# Altium PCB Pulser.PcbDoc
Units mm, origin at the board's own origin, x right, y up, seen from the top; angles counter-clockwise.
Board outline 100 x 100 mm, 4 copper layers (Top Layer, GND, PWR, Bottom Layer), stack 1.564 mm thick; 85 components, 67 nets, 326 pads, 191 vias.
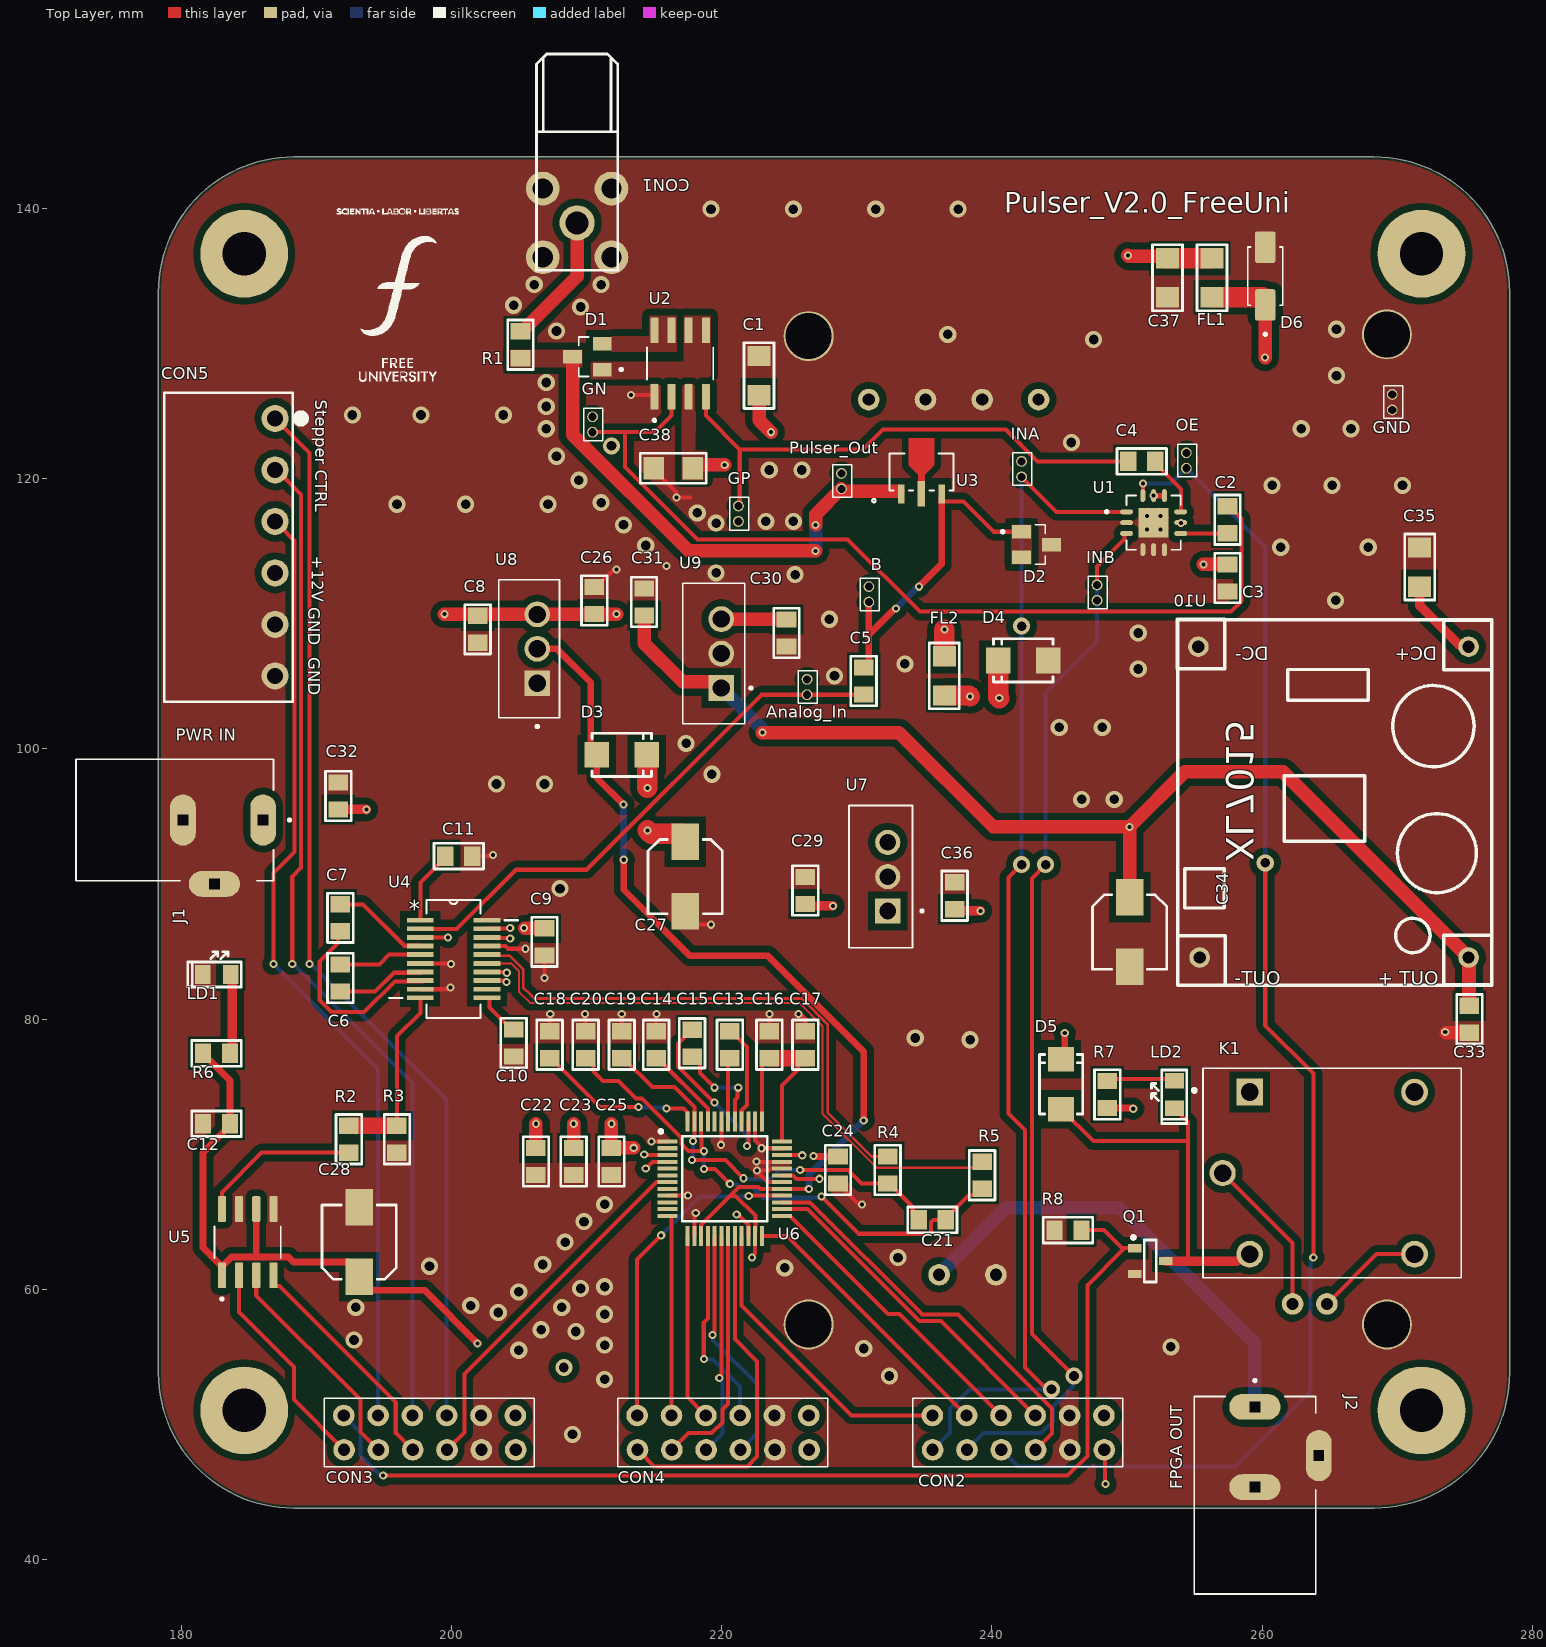
[diagram p0: Top Layer view]
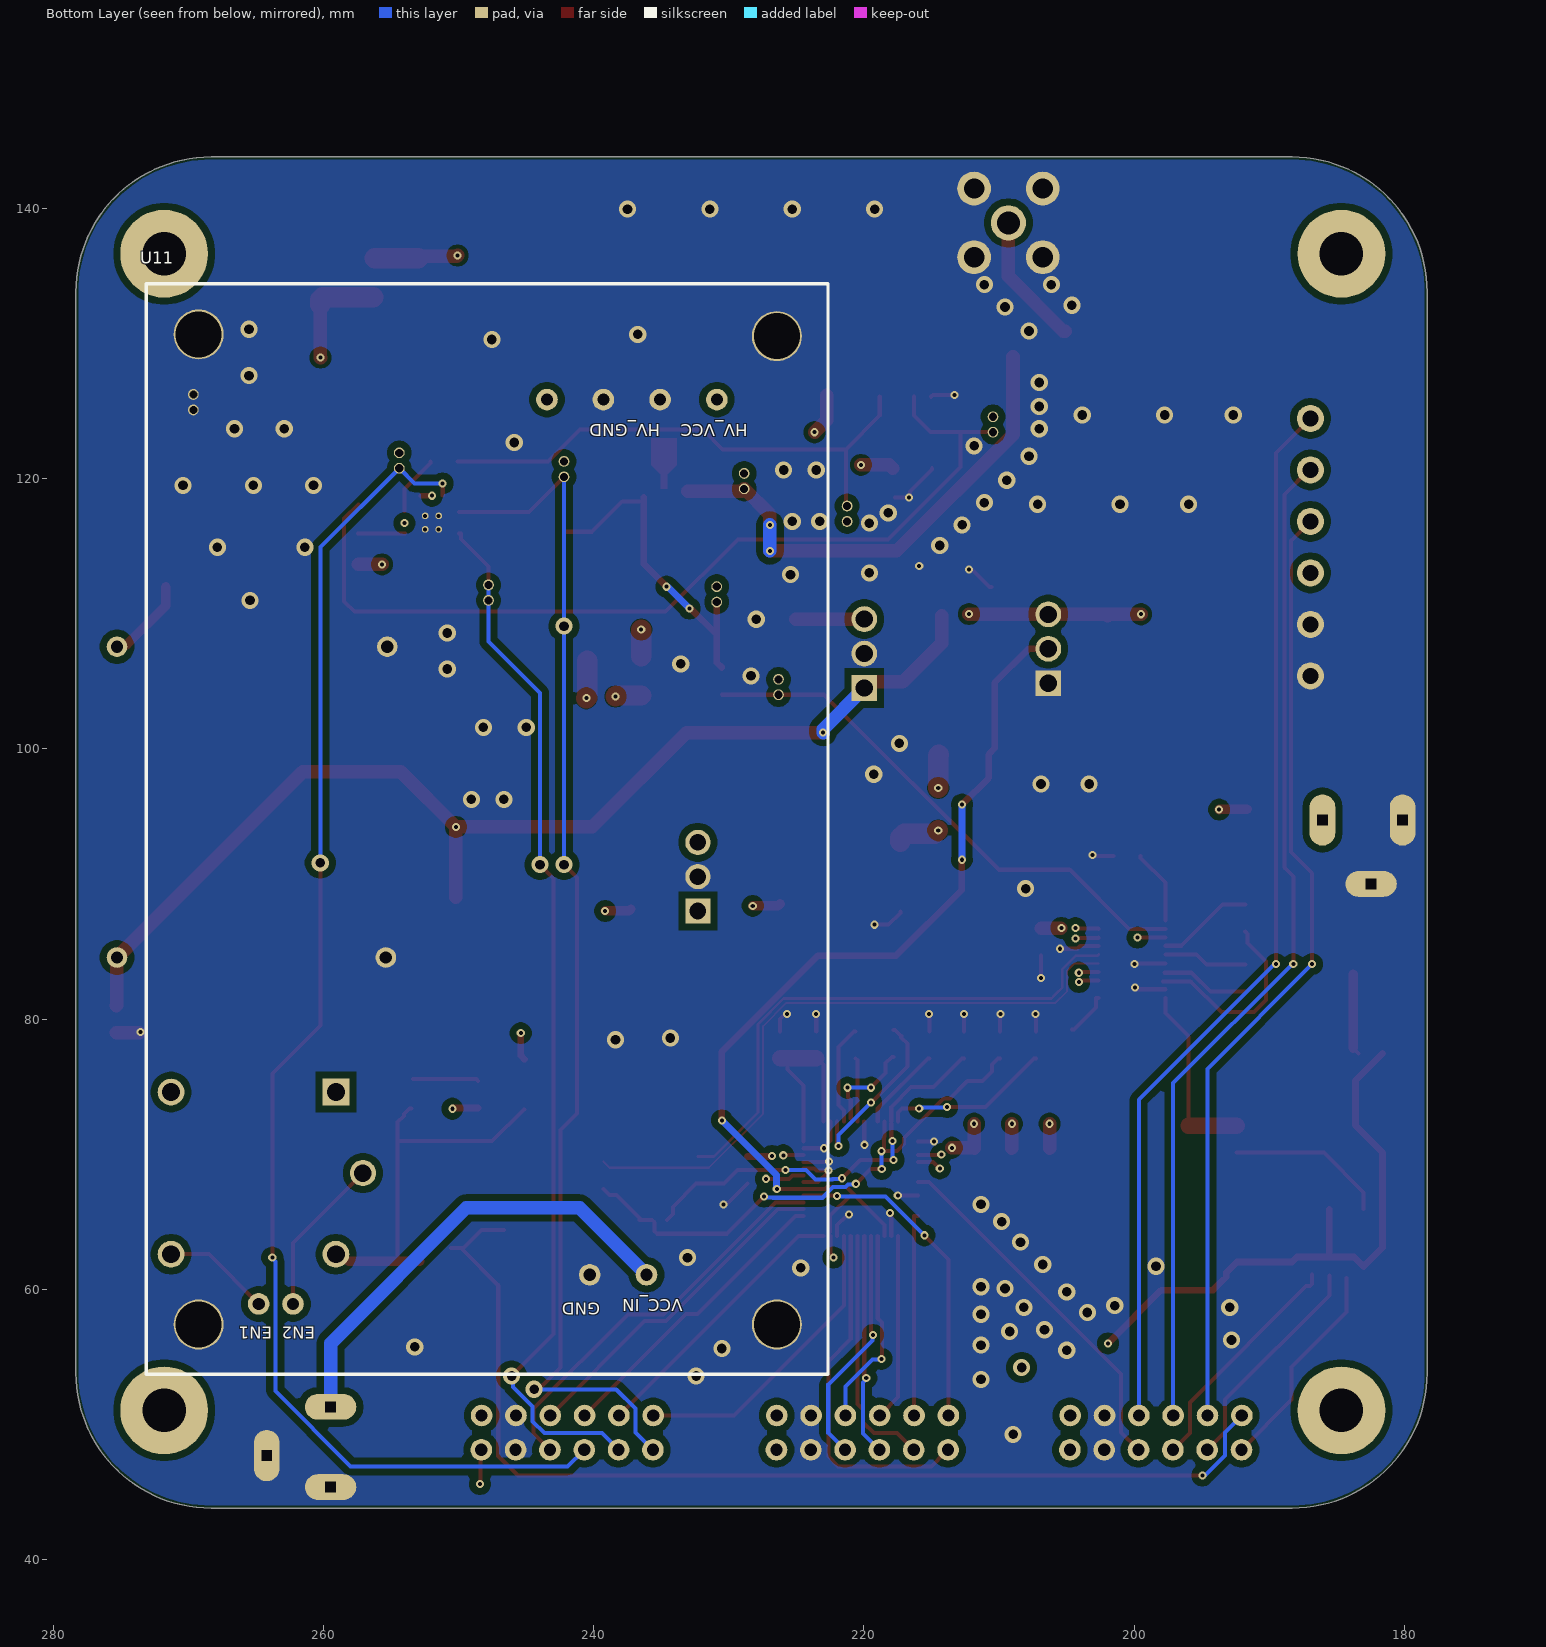
[diagram p1: Bottom Layer view, seen from below]
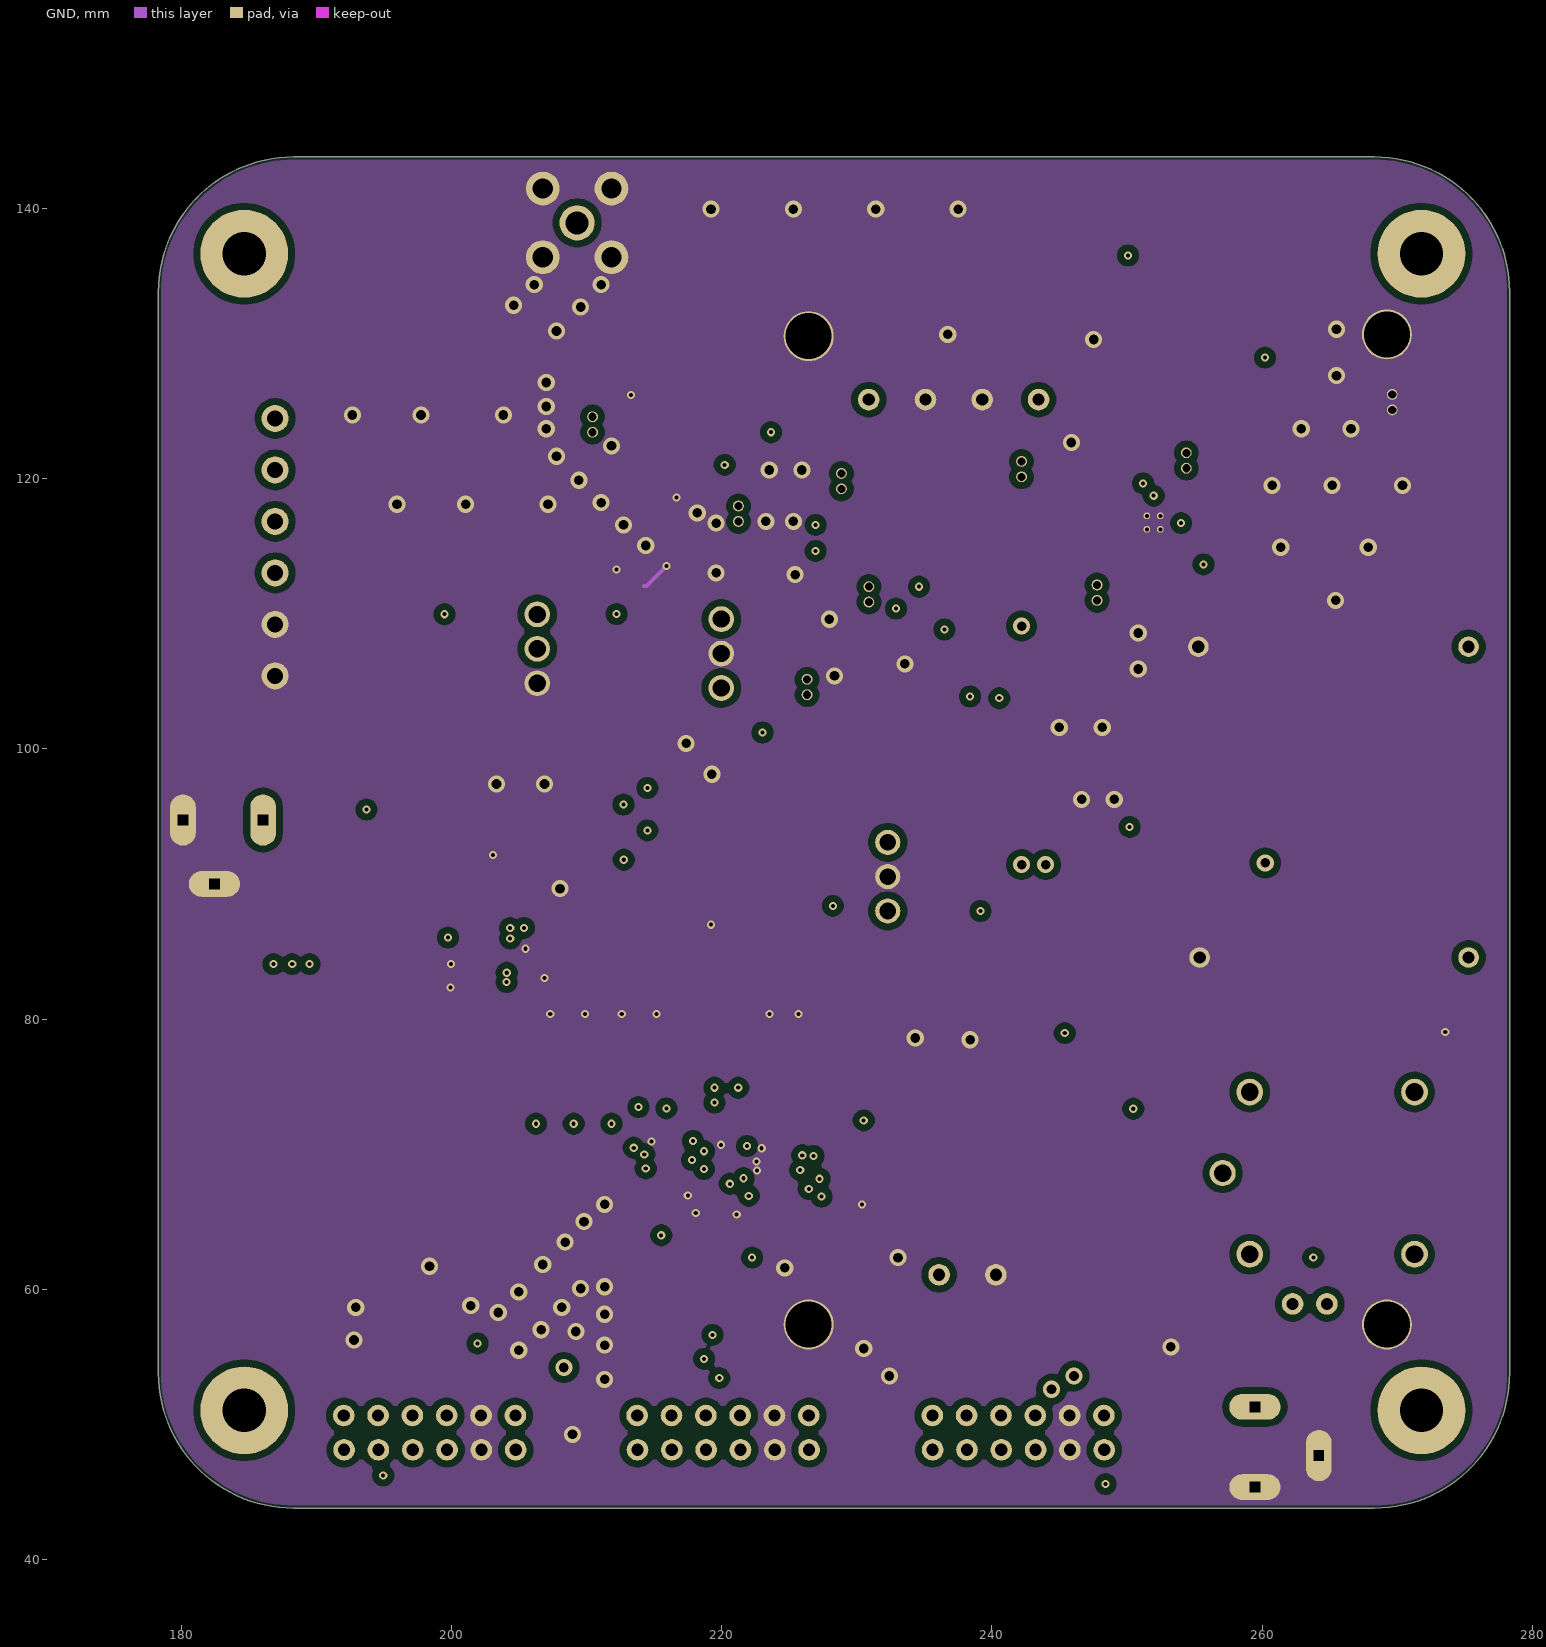
[diagram p2: GND]
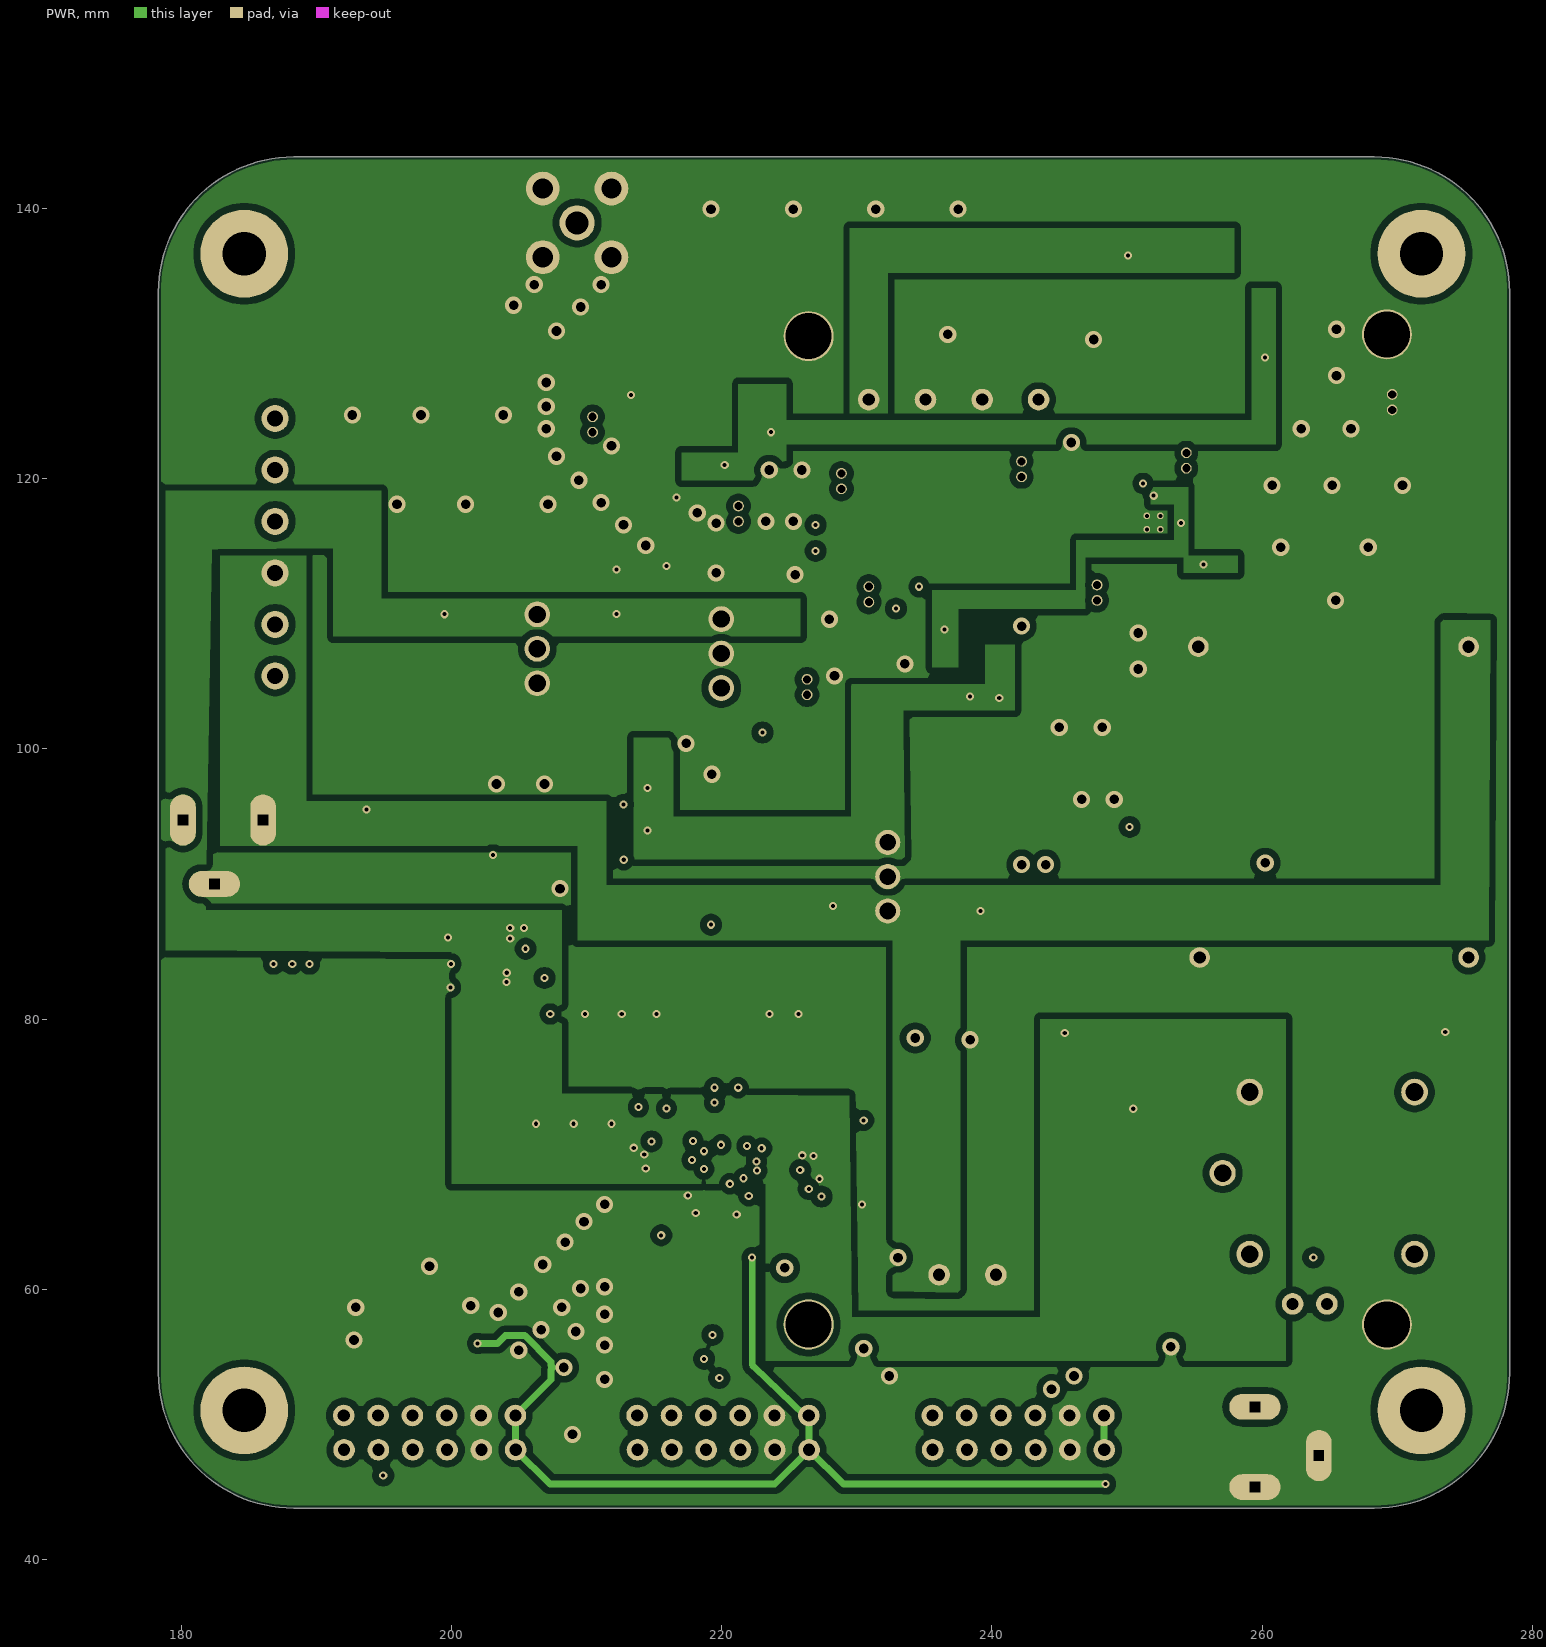
[diagram p3: PWR]

## Layer stack, top to bottom
Top Solder: solder mask 0.0102, Solder Resist, Dk 3.5
Top Layer: signal copper 0.035
Dielectric 2: prepreg 0.0994, PP-006, Dk 4.1
GND: signal copper 0.0152
Dielectric 1: dielectric 1.265, FR-4, Dk 4.6
PWR: signal copper 0.0152
Dielectric 3: prepreg 0.0994, PP-006, Dk 4.1
Bottom Layer: signal copper 0.035
Bottom Solder: solder mask 0.0102, Solder Resist, Dk 3.5

## Board outline
178.308,53.815 178.308,133.815 cw(c188.308,133.815) 188.308,143.815 268.308,143.815 cw(c268.308,133.815) 278.308,133.815 278.308,53.815 cw(c268.308,53.815) 268.308,43.815 188.308,43.815 cw(c188.308,53.815)

## Design rules (kind name [scope] priority, off if disabled: settings)
BoardOutlineClearance [All] p1: gap=0.2 ignorepadtopadclearanceinfootprint=FALSE except(0: Track-OutlineEdge)
Clearance Clearance_2 [InDifferentialPair('ADC_IN')] p1: gap=0.5 ignorepadtopadclearanceinfootprint=TRUE except(0.08: SMDPad-SMDPad; 0.1: Arc-Arc Arc-Track Track-Track; 0.152: Arc-SMDPad Arc-Text Track-SMDPad Track-Text SMDPad-THPad SMDPad-Via SMDPad-Text SMDPad-Hole THPad-THPad THPad-Via THPad-Text THPad-Hole Via-Text Fill-Text Fill-Hole Poly-Text Poly-Hole Region-Text Region-Hole Text-Text Text-Hole; 0.2: Arc-Via Arc-Hole Track-Via Track-Hole; 0.28: Arc-THPad Track-THPad)
Clearance Clearance_1 [InNetClass('High Voltage')] p2: gap=0.6 ignorepadtopadclearanceinfootprint=TRUE
Clearance [All] p3: gap=0.5 ignorepadtopadclearanceinfootprint=TRUE except(0.08: SMDPad-SMDPad; 0.152: Arc-SMDPad Arc-Text Track-SMDPad Track-Text SMDPad-THPad SMDPad-Via SMDPad-Text SMDPad-Hole THPad-THPad THPad-Via THPad-Text THPad-Hole Via-Text Fill-Text Fill-Hole Poly-Text Poly-Hole Region-Text Region-Hole Text-Text Text-Hole; 0.2: Arc-Arc Arc-Track Arc-Via Arc-Hole Track-Track Track-Via Track-Hole; 0.28: Arc-THPad Track-THPad)
ComponentClearance [All] p1 off: gap=0.254 collisioncheckmode=3 verticalgap=0.254 showdistances=FALSE
DiffPairsRouting [All] p1: maxlimit=0.25 minlimit=0.15 mostfreqgap=0.2 toplayer_minwidth=0.15 toplayer_maxwidth=0.25 toplayer_prefwidth=0.2 midlayer1_minwidth=0.15 midlayer1_maxwidth=0.25 midlayer1_prefwidth=0.2 midlayer2_minwidth=0.15 midlayer2_maxwidth=0.25 midlayer2_prefwidth=0.2 bottomlayer_minwidth=0.15 bottomlayer_maxwidth=0.25 bottomlayer_prefwidth=0.2 maxuncoupledlength=12.7
Height [All] p1: minheight=0 maxheight=1816.048 prefheight=12.7
HoleSize [All] p1: absolutevalues=TRUE maxlimit=6.3 minlimit=0.3 maxpercent=80.000 minpercent=20.000
HoleToHoleClearance [All] p1: gap=0.25 allowstackedmicrovias=FALSE
MatchedLengths MatchLengths_xSignals_U6_CON2,CON3,CON4 [InxSignalClass('xSignals_U6_CON2,CON3,CON4_MatchLengthsClass')] p1: tolerance=2.54 checknetsindiffpair=FALSE checkdiffpairvsdiffpair=TRUE checkxsignals=TRUE checkothers=TRUE
MinimumAnnularRing [All] p1: minimumring=0.076
MinimumSolderMaskSliver [All] p1: minsoldermaskwidth=0
PlaneClearance [All] p1: clearance=0.203
PlaneConnect [All] p1: planeconnectstyle=Direct reliefexpansion=0.3 reliefentries=4 reliefconductorwidth=0.203 reliefairgap=0.203
PolygonConnect PolygonConnect_1 [IsVia] p1: connectstyle=Direct reliefconductorwidth=0.254 reliefentries=4 polygonreliefangle="90 Angle" airgapwidth=0.254
PolygonConnect [IsPad] p2: connectstyle=Direct reliefconductorwidth=0.8 reliefentries=4 polygonreliefangle="90 Angle" airgapwidth=0.5
RoutingVias [All] p1: holewidth=0.3 width=0.6 viastyle="Through Hole" minholewidth=0.3 minwidth=0.6 maxholewidth=0.6 maxwidth=6.6
SilkToSilkClearance [All] p1: silktosilkclearance=0
SilkToSolderMaskClearance [IsPad] p1: minsilkscreentomaskgap=0 clearancetoexposedcopper=TRUE
SolderMaskExpansion [All] p1: expansion=0.075 istentingtop=FALSE
SupplyNets "Schematic Supply Nets_8" [InNet('+5V')] p1: voltage=0.000
SupplyNets "Schematic Supply Nets_7" [InNet('+12V')] p2: voltage=0.000
SupplyNets "Schematic Supply Nets_6" [InNet('+10V')] p3: voltage=0.000
SupplyNets "Schematic Supply Nets_5" [InNet('+100V')] p4: voltage=0.000
SupplyNets "Schematic Supply Nets_4" [InNet('+3.3V')] p5: voltage=0.000
SupplyNets "Schematic Supply Nets_3" [InNet('+6.5V')] p6: voltage=0.000
SupplyNets "Schematic Supply Nets" [InNet('GND')] p7: voltage=0.000
Width "100 Width" [InNetClass('High Voltage')] p1: maxlimit=5 minlimit=0.5 preferedwidth=1.5
Width PWR_WIDTH [InNetClass('Power')] p2: maxlimit=5 minlimit=0.3 preferedwidth=0.7
Width [All] p3: maxlimit=4 minlimit=0.3 preferedwidth=0.3
20 further rules are at their usual default settings.

## Classes and differential pairs
component class Pulser: Analog_In B C1 C2 C3 C4 C5 CON1 D1 D2 FL2 GN GND GP INA INB OE Pulser_Out R1 U1 U2 U3
component class Power: C26 C27 C28 C29 C30 C31 C32 C33 C34 CON5 D3 D4 J1 J2 LD1 R6 U7 U8 U9 U10
component class "Boost Converter": C35 C36 C37 C38 D5 D6 FL1 K1 LD2 Q1 R7 R8 U11
component class "Analog Front End": C6 C7 C8 C9 C10 C11 C12 R2 R3 U4 U5
component class ADC: C13 C14 C15 C16 C17 C18 C19 C20 C21 C22 C23 C24 C25 CON2 CON3 CON4 R4 R5 U6
differential pair ADC_IN: +ADC_IN_P -ADC_IN_N

## Components (designator, comment, footprint, x,y, rotation, side; value= is the part's Value field where it differs from the comment)
Analog_In "TP" CON_TP 226.314,104.267 r0 top (schematic designator TP7)
B "TP" CON_TP 230.886,111.125 r0 top (schematic designator TP9)
C1 "1uF" CAP_1206 222.758,127.635 r270 top
C2 "10nF" CAP_0805 257.429,116.967 r90 top
C3 "0.47uF" CAP_0805 257.429,112.649 r270 top
C4 "10nF" CAP_0805 251.079,121.285 r180 top
C5 "0.1uF" CAP_0805 230.505,105.029 r90 top
C6 "0.1uF" CAP_0805 191.77,83.058 r90 top
C7 "0.1uF" CAP_0805 191.77,87.503 r90 top
C8 "0.1uF" CAP_0805 201.93,108.855 r90 top
C9 "0.1uF" CAP_0805 206.883,85.725 r90 top
C10 "0.1uF" CAP_0805 204.597,78.232 r90 top
C11 "0.1uF" CAP_0805 200.533,92.075 r180 top
C12 "0.1uF" CAP_0805 182.611,72.263 r0 top
C13 "0.1uF" CAP_0805 220.599,78.105 r90 top
C14 "0.1uF" CAP_0805 215.138,78.105 r270 top
C15 "0.1uF" CAP_0805 217.805,78.216 r90 top
C16 "0.1uF" CAP_0805 223.52,78.105 r270 top
C17 "4.7uF" CAP_0805 226.187,78.105 r270 top
C18 "100nF" CAP_0805 207.264,78.105 r270 top
C19 "22pF" CAP_0805 212.598,78.105 r270 top
C20 "22pF" CAP_0805 209.931,78.105 r270 top
C21 "220pF" CAP_0805 235.585,65.151 r0 top
C22 "100nF" CAP_0805 206.248,69.469 r270 top
C23 "10uF" CAP_0805 209.042,69.469 r90 top
C24 "100nF" CAP_0805 228.6,68.834 r270 top
C25 "10uF" CAP_0805 211.836,69.469 r90 top
C26 "0.33uF" CAP_0805 210.566,110.982 r270 top
C27 "22uf" CAP_CAN_D5MM 217.297,90.551 r270 top
C28 "22uf" CAP_CAN_D5MM 193.167,63.5 r90 top
C29 "0.33uF" CAP_0805 226.187,89.535 r270 top
C30 "0.1uF" CAP_0805 224.79,108.585 r90 top
C31 "0.33uF" CAP_0805 214.249,110.871 r270 top
C32 "0.1uF" CAP_0805 191.63,96.526 r270 top
C33 "0.1uF" CAP_0805 275.336,79.994 r90 top
C34 "100uf" CAP_CAN_D5MM 250.19,86.452 r270 top
C35 "1uF" CAP_1206 271.653,113.464 r270 top
C36 "10uF" CAP_0805 237.236,89.138 r270 top
C37 "10uF" CAP_1206 252.984,134.874 r90 top
C38 "1uF" CAP_1206 216.408,120.777 r0 top
CON1 "SMA" A-SMA-KWE-15.1A 209.296,138.938 r0 top
CON2 "Arty_S7_Header" CON_2x6_2.54MM_THT 243.205,49.403 r90 top locked
CON3 "Arty_S7_Header" CON_2x6_2.54MM_THT 199.644,49.403 r90 top locked
CON4 "Arty_S7_Header" CON_2x6_2.54MM_THT 221.361,49.403 r90 top locked
CON5 "KF2EDGV-bend-3.81-6p" CONGREEN_1x6_3.81 186.944,114.935 r270 top
D1 "BAV99" DIO_BAV99 210.058,129.032 r180 top
D2 "BAV99" DIO_BAV99 243.289,115.128 r0 top
D3 "SS16" DO-214AC 212.598,99.568 r180 top
D4 "SS16" DO-214AC 242.316,106.553 r0 top
D5 "SS16" DO-214AC 245.11,75.184 r270 top
D6 "B1100-13F" DIOM5226X230N 260.223,135.001 r90 top
FL1 "" BEAD1206S601A40T 256.286,134.874 r270 top
FL2 "" BEAD1206S601A40T 236.474,105.41 r270 top
GN "TP" CON_TP 210.439,123.698 r0 top (schematic designator TP1)
GND "TP" CON_TP 269.621,125.349 r0 top (schematic designator TP8)
GP "TP" CON_TP 221.234,117.094 r0 top (schematic designator TP6)
INA "TP" CON_TP 242.189,120.396 r0 top (schematic designator TP2)
INB "TP" CON_TP 247.777,111.252 r0 top (schematic designator TP3)
J1 "Barrel Jack" MPD_EJ503A 179.515,94.742 r270 top
J2 "FPGA OUT" MPD_EJ503A 259.461,44.768 r0 top
K1 "SRD-05VDC-SL-C" RELAY_SRD-05VDC-SL-C 265.172,68.611 r0 top
LD1 "PWR LED" LED_0805 182.626,83.312 r0 top
LD2 "LED_0805" LED_0805 253.492,74.422 r90 top (schematic designator LED1)
OE "TP" CON_TP 254.381,121.031 r0 top (schematic designator TP5)
Pulser_Out "TP" CON_TP 228.854,119.507 r0 top (schematic designator TP4)
Q1 "DMN3404L-7" SOT23-3 251.714,62.103 r180 top
R1 "200R" RES_0805 205.105,129.921 r90 top
R2 "10k" RES_0805 192.405,71.12 r90 top
R3 "10k" RES_0805 195.961,71.12 r90 top
R4 "33R" RES_0805 232.283,68.834 r90 top
R5 "33R" RES_0805 239.268,68.453 r90 top
R6 "220R" RES_0805 182.611,77.47 r180 top
R7 "330" RES_0805 248.539,74.422 r270 top
R8 "4.7k" RES_0805 245.618,64.389 r0 top
U1 "MD1213K6-G" QFN80P400X400X90-13N 251.961,116.753 r0 top
U2 "TC6320TG-G" SOIC127P600X175-8N 216.916,128.524 r90 top
U3 "MD0100 T/R Switch" TO-243AA_MCH 234.778,120.503 r0 top
U4 "AD8331ARQZ" SOP64P600X165-20N 200.152,84.455 r0 top
U5 "MCP4821-E/SN" SOIC127P600X175-8N 184.912,63.5 r90 top
U6 "AD9226ASTZ" QFP50P900X900X160-48N 220.218,68.199 r0 top
U7 "LM2940T-10.0" TO254P1054X470X1955-3 232.283,90.551 r90 top
U8 "LD1117V33" TO255P1020X450X1968-3 205.74,107.415 r90 top
U9 "L7805CV" TO255P1040X460X1968-3 219.964,104.511 r90 top
U10 "XL7015 Module" XL7015 264.583,95.813 r90 top
U11 "Boost_Conv_Module" Boost_Converter 248.276,93.853 r0 bottom

## Footprints (in the part's own frame and the unit in brackets; to place one, negate y for a bottom-side part, rotate by r counter-clockwise, add the part's x,y. Pads: shape width x height; smd on the part's side, far side on the other; paste and mask are expansions set on the pad)
A-SMA-KWE-15.1A [mm] "1 Inner Bore SMA Board Side Elbow 6GHz 50Ω 5.35mm Through Hole Coaxial Connector (RF) Adapters RoHS"
  round 2.5 hole 1.5: 1(-2.54,2.54) 2(-2.54,-2.54) 3(2.54,-2.54) 4(2.54,2.54)
  round 2.6 hole 1.7: 5(0,0)
  silkscreen extent -3,-3.5 3,12.5, body extent -3,-3 3,11.6, height 11
BEAD1206S601A40T [mm]
  rect 1.5x1.7 smd: 1(-1.45,0) 2(1.45,0)
  silkscreen extent -2.44,-1.11 2.44,1.11, body extent -1.53,-0.8 1.53,0.8, height 0.8
Boost_Converter [mm]
  round 1.6 hole 0.9: 1(-12.192,32.766) 2(-13.199,-32.004) 2(-8.999,-32.004) 2(-7.992,32.766) 3(16.51,34.925) 4(13.97,34.925) 5(-17.399,-32.004) 6(-4.826,-32.004)
  round 3.7 hole 3.4: 2(-21.844,-36.703) 2(-21.844,36.449) 2(20.955,-36.83) 2(20.955,36.449)
  silkscreen extent -25.63,-40.57 24.82,40.12, body extent -25.27,-40.39 24.38,39.62, height 0.25
CAP_0805 [mm] "Chip Capacitor, 2-Leads, Body 2,03x1,35mm, IPC Medium Density"
  rect 1.2x1.45 smd: 1(-1,0) 2(1,0)
  silkscreen extent -1.83,-0.95 1.83,0.95, body extent -1.02,-0.7 1.02,0.7, height 1.3
CAP_1206 [mm] "Chip Capacitor, 2-Leads, Body 3,05x1,56mm, IPC Medium Density"
  rect 1.5x1.7 smd: 1(-1.45,0) 2(1.45,0)
  silkscreen extent -2.44,-1.11 2.44,1.11, body extent -1.53,-0.8 1.53,0.8, height 0.8
CAP_CAN_D5MM [mm] "Aluminum Electrolytic Capacitor, Body 5,40x5,40x5,50mm, IPC Low Density"
  rect 2.7x2.05 smd: 1(-2.575,0) 2(2.575,0)
  silkscreen extent -2.75,-2.75 2.75,2.75, body extent -2.75,-2.75 2.75,2.75, height 5.5
CON_2x6_2.54MM_THT [mm]
  round 1.6 hole 0.9: 1(-1.27,7.596) 2(-1.27,5.056) 3(-1.27,2.516) 4(-1.27,-0.024) 5(-1.27,-2.564) 6(-1.27,-5.104) 7(1.27,7.62) 8(1.27,5.08) 9(1.27,2.54) 10(1.27,0) 11(1.27,-2.54) 12(1.27,-5.08)
  silkscreen extent -2.54,-6.48 2.54,9.06, body extent -2.27,-6.48 2.29,8.76, height 6.3
CON_TP [mm] "Test Point"
  round 0.8 hole 0.6: 1(0,-0.254) 1(0,0.889)
  silkscreen extent -0.64,-0.89 0.76,1.52, body extent -0.64,-0.76 0.76,1.4, height 6.3
CONGREEN_1x6_3.81 [mm] "SOIC, 100-Leads, Body 64,17x3,05mm, Pitch 1,27mm, IPC Medium Density"
  round 2 hole 1.2: 1(-9.525,0) 2(-5.715,0) 3(-1.905,0) 4(1.905,0) 5(5.715,0) 6(9.525,0)
  silkscreen extent -11.43,-8.2 11.43,2.2, body extent -11.43,-8 11.43,1.35, height 6.8
DIO_BAV99 [mm]
  rect 1.4x1 smd: 1(-1.1,0.95) 2(-1.1,-0.95) 3(1.1,0)
  silkscreen extent -2.6,-1.46 0.65,1.46, body extent -1.2,-1.46 1.2,1.46, height 1.2
DIOM5226X230N [mm]
  rrect25% 2.33x1.55 smd: 1(-2.135,0) 2(2.135,0)
  silkscreen extent -4.4,-1.3 2.15,1.3, body extent -2.6,-1.3 2.6,1.3, height 2.4
DO-214AC [mm] "SODFL, 2-Leads, Body 1,30x2,50mm, IPC Medium Density"
  rect 1.8x1.9 smd: 1(-1.85,0) 2(1.85,0)
  silkscreen extent -2.2,-1.6 2.2,1.6, body extent -2,-1.4 2,1.4, height 2.3
LED_0805 [mm]
  rect 1.15x1.4 smd: 1(-1.025,0) 2(1.025,0)
  silkscreen extent -2.14,-0.93 1.81,1.69, body extent -1.03,-0.64 1.04,0.64, height 1.4
MPD_EJ503A [mm]
  oval 3.8x1.9 hole 0.76 square: 1(0,6.54) 2(0,0.61)
  oval 1.9x3.8 hole 0.76 square: 3(4.73,2.94)
  silkscreen extent -4.5,-7.31 4.5,8.59, body extent -4.5,-7.31 4.88,7.31, height 11
QFN80P400X400X90-13N [mm]
  oval 0.95x0.37 smd paste+0 mask+0.102: 1(-2,0.8) 2(-2,0) 3(-2,-0.8) 7(2,-0.8) 8(2,0) 9(2,0.8)
  oval 0.37x0.95 smd paste+0 mask+0.102: 4(-0.8,-2) 5(0,-2) 6(0.8,-2) 10(0.8,2) 11(0,2) 12(-0.8,2)
  round 0.5 hole 0.3 mask+0: 13(-0.5,-0.5) 13(-0.5,0.5) 13(0.5,-0.5) 13(0.5,0.5)
  rect 2.2x2.2 smd paste-0.404 mask+0.102: 13(0,0)
  silkscreen extent -3.57,-2 2,2
QFP50P900X900X160-48N [mm]
  rect 1.475x0.3 smd: 1(-4.238,2.75) 2(-4.238,2.25) 3(-4.238,1.75) 4(-4.238,1.25) 5(-4.238,0.75) 6(-4.238,0.25) 7(-4.238,-0.25) 8(-4.238,-0.75) 9(-4.238,-1.25) 10(-4.238,-1.75) 11(-4.238,-2.25) 12(-4.238,-2.75) 25(4.238,-2.75) 26(4.238,-2.25) 27(4.238,-1.75) 28(4.238,-1.25) 29(4.238,-0.75) 30(4.238,-0.25) 31(4.238,0.25) 32(4.238,0.75) 33(4.238,1.25) 34(4.238,1.75) 35(4.238,2.25) 36(4.238,2.75)
  rect 0.3x1.475 smd: 13(-2.75,-4.238) 14(-2.25,-4.238) 15(-1.75,-4.238) 16(-1.25,-4.238) 17(-0.75,-4.238) 18(-0.25,-4.238) 19(0.25,-4.238) 20(0.75,-4.238) 21(1.25,-4.238) 22(1.75,-4.238) 23(2.25,-4.238) 24(2.75,-4.238) 37(2.75,4.238) 38(2.25,4.238) 39(1.75,4.238) 40(1.25,4.238) 41(0.75,4.238) 42(0.25,4.238) 43(-0.25,4.238) 44(-0.75,4.238) 45(-1.25,4.238) 46(-1.75,4.238) 47(-2.25,4.238) 48(-2.75,4.238)
  silkscreen extent -4.85,-3.15 3.15,3.62
RELAY_SRD-05VDC-SL-C [mm]
  rect 1.98x1.98 / inner round 1.98 / far side rect 1.98x1.98 hole 1.32: A1(-6.1,6)
  round 1.98 hole 1.32: A2(-6.1,-6) NC(6.1,6) NO(6.1,-6)
  round 1.935 hole 1.29: COM(-8.1,0)
  silkscreen extent -10.3,-7.75 9.55,7.75, body extent -9.6,-7.8 9.6,7.8, height 15.8
RES_0805 [mm]
  rect 1.2x1.45 smd: 1(-1,0) 2(1,0)
  silkscreen extent -1.83,-0.95 1.83,0.95, body extent -1.02,-0.7 1.02,0.7, height 1.3
SOIC127P600X175-8N [mm]
  rrect25% 1.9x0.6 smd: 1(-2.455,1.905) 2(-2.455,0.635) 3(-2.455,-0.635) 4(-2.455,-1.905) 5(2.455,-1.905) 6(2.455,-0.635) 7(2.455,0.635) 8(2.455,1.905)
  silkscreen extent -4.3,-2.45 1.18,2.45
SOP64P600X165-20N [mil]
  rect 78x14 smd paste+0 mask+4.02: 1(-97,113) 2(-97,88) 3(-97,63) 4(-97,38) 5(-97,13) 6(-97,-13) 7(-97,-38) 8(-97,-63) 9(-97,-88) 10(-97,-113) 11(97,-113) 12(97,-88) 13(97,-63) 14(97,-38) 15(97,-13) 16(97,13) 17(97,38) 18(97,63) 19(97,88) 20(97,113)
  silkscreen extent -188,-172 187,172, body extent -118,-170 118,170, height 69
SOT23-3 [mm] "SOT23, 5-Leads, Body 2,95x2,45mm, Pitch 0,95mm, IPC Medium Density"
  rect 1x0.6 smd: 1(1.15,-0.95) 2(1.15,0.95) 3(-1.15,0)
  silkscreen extent -0.45,-1.87 1.37,1.55, body extent -0.85,-1.55 0.85,1.55, height 1.3
TO254P1054X470X1955-3 [mm]
  rect 1.86x1.86 / inner round 1.86 / far side rect 1.86x1.86 hole 1.24: 1(-2.54,0)
  round 1.86 hole 1.24: 2(0,0) 3(2.54,0)
  silkscreen extent -5.27,-2.64 5.27,2.86, body extent -5.08,-2.35 5.08,2.35, height 15.49
TO255P1020X450X1968-3 [mm]
  rect 1.91x1.91 / inner round 1.91 / far side rect 1.91x1.91 hole 1.27: 1(-2.55,-0.605)
  round 1.91 hole 1.27: 2(0,-0.605) 3(2.55,-0.605)
  silkscreen extent -5.85,-2.25 5.1,2.25, body extent -5.1,-2.25 5.1,2.25, height 19.68
TO255P1040X460X1968-3 [mm]
  rect 1.91x1.91 / inner round 1.91 / far side rect 1.91x1.91 hole 1.27: 1(0,0)
  round 1.91 hole 1.27: 2(2.55,0) 3(5.1,0)
  silkscreen extent -2.65,-2.29 7.75,2.86, body extent -2.65,-1.64 7.55,2.86, height 19.68
TO-243AA_MCH [mm]
  rect 0.48x1.403 smd paste+0 mask+0: 1(-1.5,-1.623) 3(1.5,-1.623)
  rect 0.56x1.9 smd paste+0 mask+0: 2(0,-1.623)
  Top Layer region: 0.24,-1.232 -0.24,-1.232 -0.24,-0.191 -0.94,0.484 -0.94,2.476 -0.483,2.476 0.483,2.476 0.94,2.476 0.94,0.484 0.24,-0.191
  silkscreen extent -3.64,-2.25 2.37,1.36
XL7015 [mil]
  round 60 hole 36 paste-99999 mask+2: 1(-442.67,-420.74) 2(-442.67,362.72) 2(462.84,366.66) 3(462.84,-420.74)
  silkscreen extent -524,-488 543,428

## Part data
Analog_In B GN GND GP INA INB OE Pulser_Out: library part Test_Point
C1 C35 C37 C38: library part CAP_1206, "CAP_1206", note="any manufacturer"
  C1 C35 C38: val=1uF
  C37: val=10uF
C2 C3 C4 C5 C6 C7 C8 C9 C10 C11 C12 C13 C14 C15 C16 C17 C18 C19 C20 C21 C22 C23 C24 C25 C26 C29 C30 C31 C32 C33 C36: library part CAP_0805, "CAP_0805", note="any manufacturer"
  C2 C4: val=10nF
  C3: val=0.47uF
  C5 C6 C7 C8 C9 C10 C11 C12 C13 C14 C15 C16 C30 C32 C33: val=0.1uF
  C17: val=4.7uF
  C18 C22 C24: val=100nF
  C19 C20: val=22pF
  C21: val=220pF
  C23 C25 C36: val=10uF
  C26 C29 C31: val=0.33uF
C27 C28 C34: library part CAP_CAN_D5mm, "SMD Can Capacitor; 5mm Diameter", note="any manufacturer", sample link=https://www.lcsc.com/product-detail/C3357.html?s_z=n_10uF%2520SMD%2520Can%2520Capacitor%2520D5%2520RVT
  C27 C28: val=22uf
  C34: val=100uf
CON1: library part A-SMA-KWE-15.1A, "SMA Connector - 1 Inner Bore SMA Board Side Elbow 6GHz 50Ω 5.35mm Through Hole Coaxial Connector (RF) Adapters RoHS", sample link=https://www.lcsc.com/product-detail/C49253491.html?s_z=n_SMA, val="MyAntenna A-SMA-KWE-15.1A"
CON5: library part CONGREEN_1x6_3.81, note="any manufacturer", sample link=https://detail.tmall.com/item.htm?abbucket=7&id=563239224672&mi_id=0000eNg2RX4a54sA2dO6nQBcXewI5pOIaHq0cbOnq7H1ZG4&ns=1&priceTId=2100c82417719338414588309e0c91&skuId=3549204641034&spm=a21n57.1.hoverItem.2&utparam=%7B%22aplus_abtest%22%3A%22cd8050d06d499e492f7c0b37ee11abfb%22%7D&xxc=taobaoSearch, val=KF2EDGV-bend-3.81-6p
D1 D2: "Diode Array 1 Pair Series Connection Standard 100V 215mA (DC) Surface Mount TO-236-3, SC-59, SOT-23-3", Package="SOT-23-3 Motorola", Availability="In Stock", Check_prices=https://www.snapeda.com/parts/BAV99/Onsemi/view-part/?ref=eda, MF="ON Semiconductor", MP=BAV99, Price=None, Purchase-URL=https://pricing.snapeda.com/search/part/BAV99/?ref=eda, SnapEDA_Link=https://www.snapeda.com/parts/BAV99/Onsemi/view-part/?ref=snap
D3 D4 D5: "Independent 60V 700mV@1A 1A SMA(DO-214AC) Single Diodes RoHS", note="any manufacturer", sample link=https://www.lcsc.com/product-detail/Schottky-Barrier-Diodes-SBD_GOODWORK-SS16_C2943739.html, unit price="$ 0.0122", val=SS16
FL1 FL2: library part BEAD1206S601A40T, Package="0603 Murata", Check_prices=https://www.snapeda.com/parts/BLM03EB500SZ1D/Murata/view-part/?ref=eda, MF=Murata, MP=BLM03EB500SZ1D, SnapEDA_Link=https://www.snapeda.com/parts/BLM03EB500SZ1D/Murata/view-part/?ref=snap
J1 J2: library part EJ503A, "Power Barrel Connector Jack 2.10mm ID (0.083), 5.50mm OD (0.217) Through Hole, Right Angle", Package=None, Availability="In Stock", Check_prices=https://www.snapeda.com/parts/EJ503A/MPD+%2528Memory+Protection+Devices%2529/view-part/?ref=eda, MF=MPD, MP=EJ503A, Price=None, Purchase-URL=https://pricing.snapeda.com/search?q=EJ503A&ref=eda, SnapEDA_Link=https://www.snapeda.com/parts/EJ503A/MPD+%2528Memory+Protection+Devices%2529/view-part/?ref=snap
K1: "5V Trigger Relay Module For Arduino And Raspberry Pi 5V Trigger Relay Module For Arduino And Raspberry Pi", Package="NON STANDARD-5 Songle Relay", Availability="Not in stock", Check_prices=https://www.snapeda.com/parts/SRD-05VDC-SL-C/Songle+Relay/view-part/?ref=eda, MF="Songle Relay", MP=SRD-05VDC-SL-C, Price=None, SnapEDA_Link=https://www.snapeda.com/parts/SRD-05VDC-SL-C/Songle+Relay/view-part/?ref=snap
LD1: library part LED_0805, "LED_0805"
Q1: "N-Channel 30V 5.8A 1.4W Surface Mount SOT-23", note=Original, sample link=https://www.lcsc.com/product-detail/MOSFETs_Diodes-Incorporated-DMN3404L-7_C155257.html, unit price="$ 0.1522", val=DMN3404L-7
R1 R2 R3 R4 R5 R6 R7 R8: library part RES_0805, "RES_0805", note="any manufacturer"
  R1: val=200R
  R2 R3: val=10k
  R4 R5: val=33R
  R6: val=220R
  R7: val=330
  R8: val=4.7k
U3: library part MD0100N8-G, "Description", Manufacturer_Name=Microchip, Copyright="Copyright (C) 2025 Ultra Librarian. All rights reserved.", Manufacturer_Part_Number=MD0100N8-G, RefDes=RefDes, Type=Type
U4: "Single VGA with Ultralow Noise Preamplifier and Programmable RIN", Package="QSOP-20 Analog Devices", Check_prices=https://www.snapeda.com/parts/AD8331ARQZ/Analog+Devices/view-part/?ref=eda, MF="Analog Devices", MP=AD8331ARQZ, SnapEDA_Link=https://www.snapeda.com/parts/AD8331ARQZ/Analog+Devices/view-part/?ref=snap
U5: "SINGLE 12-BIT DAC WITH SPI INTERACE AND INTERNAL VREF, SOIC-8", Package="SOIC-8 Microchip", Check_prices=https://www.snapeda.com/parts/MCP4821-E/SN/Microchip+Technology/view-part/?ref=eda, MF=Microchip, MP=MCP4821-E/SN, SnapEDA_Link=https://www.snapeda.com/parts/MCP4821-E/SN/Microchip+Technology/view-part/?ref=snap
U6: "AD9226ASTZ, 12 bit-Bit DAC 65Msps, Parallel, 48-Pin LQFP", Manufacturer_Name="Analog Devices", Mouser Part Number=584-AD9226ASTZ, Arrow Part Number=AD9226ASTZ, Arrow Price/Stock=https://www.arrow.com/en/products/ad9226astz/analog-devices?utm_currency=USD&region=nac, Datasheet Link=https://datasheet.datasheetarchive.com/originals/distributors/Datasheets-4/DSA-70171.pdf, Geometry.Height=1.6mm, Manufacturer_Part_Number=AD9226ASTZ, Mouser Price/Stock=https://www.mouser.co.uk/ProductDetail/Analog-Devices/AD9226ASTZ?qs=%2FtpEQrCGXCz2C6o%252BfI8LqA%3D%3D
U7: "1-A, 26-V, high-PSRR, low-dropout voltage regulator 3-TO-220 -40 to 125", Package="TO-220-3 Texas Instruments", Check_prices=https://www.snapeda.com/parts/LM2940T-5.0/Texas+Instruments/view-part/?ref=eda, MF="Texas Instruments", MP=LM2940T-5.0, SnapEDA_Link=https://www.snapeda.com/parts/LM2940T-5.0/Texas+Instruments/view-part/?ref=snap
U8: "Linear Voltage Regulator IC Positive Fixed 1 Output 800mA TO-220AB", Package="TO-220-3 STMicroelectronics", Check_prices=https://www.snapeda.com/parts/LD1117V33/STMicroelectronics/view-part/?ref=eda, MF=STMicroelectronics, MP=LD1117V33, SnapEDA_Link=https://www.snapeda.com/parts/LD1117V33/STMicroelectronics/view-part/?ref=snap
U9: "Linear Voltage Regulator IC Positive Fixed 1 Output 1.5A TO-220", Package="TO-220-3 STMicroelectronics", Check_prices=https://www.snapeda.com/parts/L7805CV/STMicroelectronics/view-part/?ref=eda, MF=STMicroelectronics, MP=L7805CV, SnapEDA_Link=https://www.snapeda.com/parts/L7805CV/STMicroelectronics/view-part/?ref=snap
U10: library part XL7015, "Buck Converter"
U11: library part Boost_Converter

## Free pads (board coordinates)
  round 6.5 hole 3.2 unplated: MH1(184.658,136.652) MH2(184.658,51.054) MH3(271.78,51.054)
  round 6.5 hole 3.2: MH4(271.78,136.652)

## Via types
v1: diameter 0.6, hole 0.3, Top Layer to Bottom Layer, 98 vias
v2: diameter 1.27, hole 0.711, Top Layer to Bottom Layer, 93 vias

## Nets (pads, with @x,y where several pads share a name; then routed paths per layer and width w, separated by ;. In a path a pad name is that pad's centre, name@x,y a point inside that pad or via, vN(x,y) a via of type N, cw(c..) or ccw(c..) an arc to the next point about the centre after c; other vN are vias at no path point)
+3.3V: C12.2 C28.1 CON2.6 CON2.12 CON3.6 CON3.12 CON4.6 CON4.12 D3.2 R6.2 U5.1 U5.6 U6.15 U6.23 U6.29 U8.2 | length 196.9
  Top Layer w0.3: U6.15 218.468,64.776 220.621,66.929 ; v1(222.25,62.357) 222.25,62.438 222.468,62.656 U6.23 ; U6.23@222.504,64.262 222.504,65.457 221.032,66.929 220.621,66.929 ; v1(226.441,67.437) 226.429,67.449 U6.29 222.863,67.449 222.733,67.579 221.271,67.579 220.621,66.929 ; CON2.6@248.285,48.133 248.36,48.058 248.36,45.645 v1(248.412,45.593)
  Top Layer w0.5: R6.2 183.609,75.472 C12.2@183.609,72.39 ; C12.2 183.611,72.138 181.61,70.137 181.61,63.092 183.007,61.695 183.709,62.397 185.547,62.397 ; U5.6@185.547,65.913 185.547,62.397 ; C28.1 193.167,61.25 192.392,62.025 188.309,62.025 187.937,62.397 185.547,62.397 ; C28.1@193.329,60.762 194.148,59.944 197.993,59.944 v1(201.93,56.007) ; U8.2 207.799,107.415 210.312,104.902 210.312,100.054 D3.2@210.671,99.695 ; D3.2 210.748,97.862 v1(212.725,95.885) ; v1(212.746,91.803) 212.746,89.583 217.64,84.69 223.414,84.69 230.505,77.598 v1(230.505,72.517)
  PWR w0.3: CON3.12@204.724,50.927 CON3.12@204.978,50.673 ; CON2.12 CON2.12@248.297,50.661
  PWR w0.5: v1(201.93,56.007) 203.404,56.007 203.981,56.584 205.427,56.584 207.371,54.641 207.371,54.376 207.518,54.229 207.371,54.082 207.371,53.32 204.978,50.927 CON3.12@204.724,50.927 ; CON3.12@204.736,50.661 204.736,48.502 CON3.6@204.851,48.387 ; CON3.6 207.288,45.593 223.925,45.593 226.338,48.006 CON4.6@226.465,48.006 ; v1(222.25,62.357) 222.25,54.421 222.396,54.275 222.4,54.271 226.142,50.671 226.348,50.671 CON4.12 ; CON4.12@226.453,50.685 226.453,48.145 CON4.6 229.005,45.593 v1(248.412,45.593) ; CON2.6@248.297,47.891 CON2.12@248.297,50.661
  Bottom Layer w0.5: v1(212.725,95.885) 212.725,91.824 v1(212.746,91.803) ; v1(226.441,67.437) 226.46,67.456 226.46,68.472 v1(230.505,72.517)
  other v2: 208.317,54.225
+5V: C8.2 C9.2 C22.1 C23.2 C24.1 C25.2 C26.2 C30.2 D5.1 K1.A1 R7.2 U4.3 U4.13 U4.14 U4.18 U4.19 U6.3 U6.4 U6.31 U6.34 U8.3 U9.3 | length 48.8
  Top Layer w0.3: U4.3 197.696,86.048 199.731,86.048 v1(199.739,86.04) ; U4.13 203.966,82.855 v1(204.075,82.745) ; U4.14 202.623,83.483 204.045,83.483 v1(204.089,83.439) ; U4.18 202.644,86.027 204.295,86.027 v1(204.343,85.979) ; U4.19 202.641,86.716 204.318,86.716 v1(204.343,86.741) ; v1(205.377,86.765) v1@205.416,86.725 ; v1(214.265,70.002) 214.318,69.949 U6.3 ; v1(214.376,68.961) 214.864,69.449 U6.4 ; U6.31 225.279,68.449 225.537,68.19 v1(227.243,68.19) ; U6.34 v1@225.939,69.949 ; C30.2@225.034,109.611 C30.2@225.044,109.601
  Top Layer w0.5: v1@225.939,69.949 v1(225.959,69.93) ; v1(226.8,69.872) 226.827,69.872 226.865,69.834 C24.1 ; D5.1 245.386,77.31 v1(245.386,78.969) ; R7.2 250.405,73.422 v1(250.454,73.373)
  Top Layer w1: v1(199.477,109.974) 201.193,109.974 201.212,109.955 201.83,109.955 C8.2 202.04,109.965 U8.3@206.358,109.965 ; v1@205.416,86.725 C9.2 ; C22.1 v1(206.248,72.263) ; U8.3@206.375,109.855 206.485,109.965 210.549,109.965 C26.2 v1(212.217,109.982) ; C23.2 v1(209.042,72.263) ; v1(211.836,72.263) C25.2 211.852,70.485 v1(213.487,70.485) ; U9.3 C30.2@225.034,109.611
+6.5V: C31.2 C33.2 C34.1 U9.1 U10.1 | length 85.2
  Top Layer w1: C31.2 214.249,107.823 217.106,104.966 219.509,104.966 U9.1 U9.1@219.964,104.394 ; v1(223.012,101.219) 233.108,101.219 240.093,94.234 v1(250.19,94.234) ; C34.1 v1(250.19,94.234) ; U10.1@275.209,84.582 275.303,84.488 275.303,81.027 C33.2 ; U10.1 261.541,98.298 254.254,98.298 v1(250.19,94.234)
  Bottom Layer w1: U9.1@219.954,104.521 223.012,101.463 v1(223.012,101.219)
+10V: C27.1 D3.1 D4.1 FL2.2 U7.3 | length 10.6
  Top Layer w1.5: D3.1 214.492,99.524 v1(214.492,97.109) ; v1@214.503,93.98 214.757,93.726 217.022,93.726 217.297,93.451 C27.1 ; FL2.2 238.305,103.96 v1(238.379,103.886) ; D4.1 240.466,103.831 v1(240.538,103.759)
  other v1: 214.492,93.98
+12V: C29.2 C32.2 C35.2 C36.2 CON5.4 J1.1 J2.1 U7.1 U10.3 U11.1 | length 46.7
  Top Layer w0.7: C32.2 193.684,95.526 v1(193.7,95.51) ; C29.2 226.33,88.392 v1(228.219,88.392) ; C36.2 237.363,88.011 v1(239.141,88.011) ; C35.2 271.653,110.617 274.543,107.727 275.112,107.727 U10.3
  Bottom Layer w1: U11.1 241.037,66.04 249.428,66.04 259.461,56.007 J2.1
+100V: C1.2 C38.2 D6.1 FL1.2 U2.3 | length 13.9
  Top Layer w1: C38.2 217.858,120.781 218.108,121.031 v1(220.218,121.031) ; C1.2 222.758,124.333 v1(223.647,123.444) ; v1(260.209,128.96) 260.223,128.974 D6.1
  Top Layer w1.5: FL1.2 260.055,133.424 260.223,133.256 D6.1
ADC_IN_N: R4.2 U4.16 | length 40.5
  Top Layer w0.2: U4.16 202.694,84.707 204.296,84.707 205.303,83.701 205.303,82.352 205.869,81.786 206.121,81.534 225.933,81.534 227.838,79.629 227.838,73.093 231.097,69.834 R4.2
ADC_IN_P: R5.2 U4.15 | length 47.8
  Top Layer w0.15: U4.15 204.419,84.125 204.978,83.566 204.978,82.042 205.811,81.209 225.729,81.209 227.457,79.481 227.457,73.014 231.464,69.007 238.822,69.007 R5.2
Analog_In: Analog_In.1 C5.1 U4.2 | length 40
  Top Layer w0.3: U4.2 200.385,86.69 204.757,91.062 210.001,91.062 222.952,104.013 230.489,104.013 C5.1
Bit_1: CON2.4 U6.27 | length 29.9
  Top Layer w0.3: U6.27 226.54,66.449 234.839,58.15 237.468,58.15 244.435,51.182 244.435,49.34 CON2.4 CON2.4@243.205,48.133
Bit_2: CON2.10 U6.26 | length 25.2
  Top Layer w0.3: U6.26 226.333,65.949 234.632,57.65 236.228,57.65 243.078,50.8 CON2.10@243.332,50.8
Bit_3: CON2.9 U6.25 | length 22.6
  Top Layer w0.3: U6.25 225.044,65.449 232.307,58.185 233.153,58.185 CON2.9 CON2.9@240.919,50.673
Bit_4: CON2.8 U6.24 | length 20.6
  Top Layer w0.3: U6.24 224.837,63.961 237.998,50.8 CON2.8@238.125,50.8
Bit_5: CON2.7 U6.21 | length 22.8
  Top Layer w0.3: U6.21 221.468,58.821 229.616,50.673 CON2.7@235.712,50.673
Bit_6: CON4.1 U6.20 | length 26.5
  Top Layer w0.3: CON4.1@213.868,47.879 214.019,47.879 214.995,46.903 221.894,46.903 222.615,47.624 222.615,54.675 220.968,56.322 U6.20
Bit_7: CON4.2 U6.19 | length 18.8
  Top Layer w0.3: CON4.2@216.154,48.006 216.178,48.006 217.535,49.363 219.25,49.363 220.051,50.164 220.051,51.102 220.468,51.519 U6.19
Bit_8: CON4.3 U6.18 | length 16.5
  Top Layer w0.3: v1(219.818,53.436) 219.818,53.517 219.968,53.667 U6.18
  Bottom Layer w0.3: CON4.3@218.821,48.26 218.972,48.26 220.051,49.34 220.051,53.122 219.818,53.355 v1(219.818,53.436)
Bit_9: CON4.4 U6.17 | length 18
  Top Layer w0.3: v1(219.318,56.642) 219.318,56.723 219.468,56.873 U6.17
  Bottom Layer w0.3: v1(219.318,56.642) 219.363,56.597 219.363,56.227 222.631,52.959 222.631,49.379 CON4.4@221.258,48.006
Bit_10: CON4.10 U6.16 | length 14.9
  Top Layer w0.3: v1(218.694,54.864) 218.668,54.89 218.668,57.553 218.968,57.853 U6.16
  Bottom Layer w0.3: v1(218.694,54.864) 218.751,54.807 219.367,54.807 221.361,52.812 221.361,50.8 CON4.10@221.488,50.673
Bit_11: CON4.9 U6.13 | length 14
  Top Layer w0.3: U6.13 217.468,52.026 218.694,50.8 CON4.9@218.694,50.419
Bit_12: CON4.8 U6.12 | length 15.2
  Top Layer w0.3: U6.12 216.281,65.449 216.281,50.927 CON4.8@216.027,50.673
CLK: CON3.4 U6.7 | length 27
  Top Layer w0.3: CON3.4@199.644,48.26 199.795,48.26 200.954,49.419 200.954,53.738 215.165,67.949 U6.7
DAC_CS: CON3.1 U5.2 | length 15.9
  Top Layer w0.3: U5.2@184.277,60.833 184.277,58.325 188.338,54.264 188.338,51.842 CON3.1
DAC_SCK: CON3.2 U5.3 | length 16.7
  Top Layer w0.3: U5.3 185.547,59.563 193.254,51.856 193.254,49.466 CON3.2
DAC_SDI: CON3.3 U5.4 | length 17.4
  Top Layer w0.3: U5.4@186.817,61.087 186.817,60.404 186.967,60.254 187.269,60.254 195.874,51.649 195.874,49.387 CON3.3
EN1: K1.NO U11.3 | length 8.1
  Top Layer w0.3: U11.3 268.469,62.611 271.145,62.611 K1.NO@271.272,62.738
EN2: K1.COM U11.4 | length 11.8
  Top Layer w0.3: K1.COM 262.246,63.437 262.246,58.937 U11.4@262.255,58.928
Gain: R2.2 R3.2 U4.10 | length 13.7
  Top Layer w0.3: R3.2 195.961,78.74 197.688,80.467 U4.10
  Top Layer w1.2: R2.2 R3.2
GND: C1.1 C3.2 C8.1 C9.1 C10.1 C11.1 C12.1 C14.1 C16.1 C17.1 C18.1 C19.1 C20.1 C22.2 C23.1 C24.2 C25.1 C26.1 C27.2 C28.2 C29.1 C30.1 C31.1 C32.1 C33.1 C34.2 C35.1 C36.1 C37.1 C38.1 CON1.1 CON1.2 CON1.3 CON1.4 CON2.5 CON2.11 CON3.5 CON3.11 CON4.5 CON4.11 CON5.5 CON5.6 D2.3 D4.2 D6.2 GND.1 J1.2 J1.3 J2.2 J2.3 LD1.1 Q1.2 R3.1 R8.1 U1.2 U1.4 U1.5 U1.6 U1.13 U2.1 U4.6 U4.9 U4.17 U4.20 U5.5 U5.7 U6.1 U6.9 U6.14 U6.22 U6.30 U6.32 U6.33 U6.35 U6.38 U6.43 U7.2 U8.1 U9.2 U10.2 U11.2 | length 52.9
  Top Layer w0.3: U4.9 199.784,82.22 v1(199.924,82.36) ; U4.6 199.916,84.125 v1(199.956,84.085) ; C11.1 202.991,92.075 v1(203.081,92.165) ; U4.17 203.983,85.42 204.186,85.217 v1(205.486,85.217) ; v1(206.883,83.058) C9.1 ; C18.1 207.264,80.231 v1@207.308,80.275 ; v1@209.89,80.275 209.931,80.234 C20.1 ; C26.1 210.691,111.982 211.936,113.227 212.16,113.227 v1(212.217,113.284) ; C19.1 v1@212.598,80.264 ; v1(213.277,126.19) 214.89,126.19 U2.1 ; v1(214.798,70.964) 214.813,70.949 U6.1 ; C38.1 214.958,120.677 216.593,119.042 216.593,118.687 v1(216.662,118.618) 217.678,118.618 ; C14.1 215.138,80.226 v1@215.177,80.265 ; U6.9 217.468,66.949 v1(217.485,66.967) ; C27.2 217.297,87.87 218.172,86.995 v1(219.202,86.995) ; U6.14 217.968,65.457 218.074,65.563 v1(218.074,65.644) ; v1(219.957,70.707) 219.968,70.718 U6.43 ; v1(221.106,65.543) 221.163,65.486 221.258,65.486 221.968,64.776 U6.22 ; U6.38 222.468,71.019 222.899,70.588 222.899,70.372 v1@222.885,70.358 ; v1(222.573,69.477) 222.601,69.449 U6.33 ; v1(222.599,68.793) 223.485,68.793 223.641,68.949 U6.32 ; v1@222.631,68.707 223.389,67.949 U6.30 ; v1(222.957,70.449) U6.35 ; C16.1 223.52,80.314 v1@223.54,80.334 ; v1(225.679,80.391) 225.736,80.334 225.863,80.334 226.187,80.01 C17.1 ; C24.2 230.158,66.276 v1(230.374,66.276) ; v1(273.546,79.066) v1@273.618,78.994
  Top Layer w1: v1@273.618,78.994 C33.1
  GND w0.3: 214.239,112.066 214.428,112.066 v1(215.9,113.538)
  other v1: 207.308,80.391 209.89,80.391 212.598,80.391 215.177,80.391 223.54,80.391
  other v2: 208.952,49.272 211.328,53.34 232.41,53.594 204.978,55.499 230.505,55.626 253.238,55.753 211.328,55.88 192.786,56.261 209.206,56.892 206.629,57.023 211.328,58.166 203.454,58.293 192.913,58.674 208.153,58.674 201.422,58.801 204.978,59.817 209.55,60.071 211.328,60.198 224.663,61.595 198.374,61.722 206.756,61.849 233.045,62.357 208.407,63.5 209.804,65.024 211.328,66.294 238.379,78.486 234.315,78.613 208.026,89.662 246.634,96.266 249.047,96.266 203.327,97.409 206.883,97.409 219.27,98.132 217.365,100.418 244.983,101.6 248.158,101.6 228.346,105.41 250.825,105.918 233.553,106.299 250.825,108.585 227.965,109.601 265.43,110.998 225.425,112.903 219.583,113.03 261.366,114.935 267.843,114.935 214.376,115.062 212.725,116.586 219.583,116.713 223.266,116.84 225.298,116.84 218.186,117.475 195.961,118.11 201.041,118.11 207.137,118.11 211.074,118.237 260.731,119.507 265.176,119.507 270.383,119.507 209.423,119.888 223.52,120.65 225.933,120.65 207.772,121.666 211.836,122.428 245.872,122.682 207.01,123.698 262.89,123.698 266.573,123.698 192.659,124.714 197.739,124.714 203.835,124.714 207.01,125.349 207.01,127.127 265.498,127.635 247.523,130.302 236.728,130.683 207.772,130.937 265.498,131.064 209.55,132.715 204.597,132.842 206.121,134.366 211.074,134.366 219.202,139.954 225.298,139.954 231.394,139.954 237.49,139.954
INA: CON2.1 INA.1 U1.1 | length 90.5
  Top Layer w0.3: v2(242.189,91.44) 241.229,90.48 241.229,73.025 242.443,71.811 242.443,54.229 243.765,52.907 243.841,52.907 244.139,52.609 v2(244.401,52.609) ; INA.1@242.189,120.142 244.778,117.553 U1.1
  Bottom Layer w0.3: CON2.1@235.204,47.879 235.355,47.879 236.895,49.419 236.895,51.182 238.322,52.609 v2(244.401,52.609) ; v2(242.189,91.44) v2(242.189,109.093) INA.1@242.189,120.142
INB: CON2.2 INB.1 U1.3 | length 78.1
  Top Layer w0.3: v2(243.967,91.44) 242.951,90.424 242.951,56.713 v2(246.07,53.594) ; INB.1@247.777,112.014 247.777,113.513 249.795,115.531 249.795,115.921 249.828,115.953 U1.3
  Bottom Layer w0.3: CON2.2@238.125,48.006 238.125,48.109 239.379,49.363 243.634,49.363 244.515,50.244 244.515,51.33 245.958,52.772 245.958,53.482 v2(246.07,53.594) ; v2(243.967,91.44) 243.967,104.14 247.777,107.95 247.777,110.998 INB.1@247.777,112.141
NetC2_1: C2.1 U1.7 | length 3.5
  Top Layer w0.3: U1.7 257.427,115.953 C2.1@257.429,115.951
NetC2_2: C2.2 GN.1 U2.2 | length 68.2
  Top Layer w0.3: GN.1@210.566,123.34 210.67,123.444 212.852,123.444 ; U2.2 216.281,124.669 215.056,123.444 212.852,123.444 ; C2.2@257.411,118.11 258.456,117.065 258.456,110.924 257.7,110.168 234.668,110.168 229.324,115.512 218.196,115.512 212.852,120.856 212.852,123.444
NetC3_1: C3.1 FL2.1 U1.8 U1.10 U1.11 | length 4.6
  Top Layer w0.3: U1.8 254,116.715 v1(254,116.713) ; C3.1@257.413,113.665 C3.1
  Top Layer w0.4: v1(251.968,118.745) U1.10@252.753,118.745
  Top Layer w1: v1(255.651,113.665) C3.1@257.413,113.665
  Top Layer w1.5: FL2.1 v1(236.474,108.839)
NetC4_1: C4.1 U1.9 | length 4.5
  Top Layer w0.3: C4.1 252.079,121.16 254,119.239 U1.9@254,117.602
NetC4_2: C4.2 GP.1 U2.4 | length 39.4
  Top Layer w0.3: U2.4 218.821,124.683 221.33,122.174 GP.1@221.33,118.014 ; 221.361,122.174 230.462,122.174 231.917,123.629 241.018,123.629 243.363,121.285 C4.2
NetC5_2: B.1 C5.2 D2.1 D2.2 U3.3 | length 24.3
  Top Layer w0.3: U3.3@236.22,118.618 U3.3@236.278,118.56 ; U3.3@236.278,118.419 236.368,118.329 237.878,118.329 240.129,116.078 D2.1
  Top Layer w0.5: C5.2 230.886,106.41 230.886,108.458 ; B.1@230.886,110.736 230.886,108.458 ; v1(232.896,110.39) 232.818,110.39 230.886,108.458 ; v1(234.607,112.01) 236.278,113.681 U3.3@236.278,118.618
  Bottom Layer w0.3: v1@234.516,112.01 v1(234.607,112.01)
  Bottom Layer w0.5: v1(232.896,110.39) v1@234.516,112.01
NetC6_1: C6.1 U4.7 | length 6.5
  Top Layer w0.3: C6.1 194.352,82.058 195.733,83.439 U4.7@197.739,83.439
NetC6_2: C6.2 U4.5 | length 6.2
  Top Layer w0.3: C6.2 194.653,84.058 195.38,84.785 U4.5
NetC7_1: C7.1 U4.8 | length 14.7
  Top Layer w0.3: C7.1 191.589,86.322 191.589,85.629 190.246,84.286 190.246,81.407 191.135,80.518 193.519,80.518 195.805,82.804 U4.8@197.866,82.804
NetC7_2: C7.2 U4.4 | length 7.2
  Top Layer w0.3: C7.2 193.437,88.503 196.502,85.438 197.67,85.438 U4.4
NetC10_2: C10.2 U4.11 | length 3.3
  Top Layer w0.3: U4.11 202.791,81.585 202.819,81.557 202.819,80.885 204.456,79.248 C10.2@204.597,79.248
NetC11_2: C11.2 U4.1 | length 5.5
  Top Layer w0.3: U4.1 197.688,90.105 199.517,91.934 C11.2@199.517,92.075
NetC13_1: C13.1 U6.42 | length 4.7
  Top Layer w0.3: U6.42 220.468,76.974 C13.1
NetC13_2: C13.2 U6.40 | length 7.4
  Top Layer w0.3: C13.2 220.724,79.105 221.869,77.96 221.869,73.652 221.693,73.477 ; U6.40 221.468,73.252 221.693,73.477
NetC14_2: C14.2 U6.45 | length 6.3
  Top Layer w0.3: C14.2 215.263,77.105 218.968,73.4 U6.45
NetC15_1: C15.1 U6.41 | length 7.2
  Top Layer w0.3: C15.1 217.93,77.216 218.38,76.766 218.38,76.006 v1(219.456,74.93) ; U6.41@220.968,72.644 220.968,74.03 221.162,74.224 221.162,74.873 v1(221.219,74.93)
  Bottom Layer w0.3: v1(219.456,74.93) v1(221.219,74.93)
NetC15_2: C15.2 U6.39 | length 13.1
  Top Layer w0.3: C15.2 217.68,79.216 217.23,78.766 217.23,78.641 216.778,78.189 216.778,76.491 219.439,73.83 v1(219.456,73.83) ; v1(221.869,70.612) 221.869,70.693 221.968,70.792 U6.39
  Bottom Layer w0.3: v1(219.456,73.83) 221.869,71.417 v1(221.869,70.612)
NetC16_2: C16.2 C17.2 U6.36 U6.37 | length 14.6
  Top Layer w0.3: U6.37@222.968,72.432 222.968,76.655 223.418,77.105 C16.2 ; U6.36 224.456,75.104 225.641,76.289 225.641,76.655 226.091,77.105 C17.2
  Top Layer w1.2: C16.2 C17.2
NetC18_2: C18.2 U6.48 | length 12.5
  Top Layer w0.3: C18.2 207.389,77.105 210.999,73.495 v1(213.83,73.495) ; v1(215.9,73.406) 217.17,73.406 217.468,73.108 U6.48
  Bottom Layer w0.3: v1(213.83,73.495) 213.874,73.45 215.856,73.45 v1(215.9,73.406)
NetC37_2: C37.2 FL1.1 U11.5 | length 6.3
  Top Layer w1: v1(250.063,136.525) 250.137,136.451 C37.2@252.984,136.451 ; FL1.1@256.212,136.324 FL1.1@256.286,136.398
  Top Layer w1.5: C37.2 FL1.1@256.212,136.324
NetCON1_5: CON1.5 R1.2 | length 9.5
  Top Layer w1: R1.2 205.23,130.921 209.296,134.987 209.296,138.43 CON1.5@209.423,138.557
NetD1_1: D1.1 U2.5 U2.6
NetD1_2: D1.2 U2.7 U2.8
NetD5_2: D5.2 K1.A2 LD2.1 Q1.3 | length 28.8
  Top Layer w0.3: D5.2 245.16,73.334 247.501,70.993 254.508,70.993 ; LD2.1 253.617,73.397 254.042,72.972 254.042,72.847 254.508,72.381 254.508,70.993 ; 254.508,62.103 254.508,70.993 ; 258.109,62.103 258.49,62.484 K1.A2@259.334,62.484
  Top Layer w0.7: Q1.3 254.508,62.103 258.109,62.103
NetLD1_2: LD1.2 R6.1 | length 6
  Top Layer w0.3: R6.1@183.372,77.47 R6.1@183.769,77.867
  Top Layer w0.7: R6.1@183.769,77.867 LD1.2@183.769,83.312
NetLD2_2: LD2.2 R7.1 | length 4.9
  Top Layer w0.3: R7.1 248.682,75.565 LD2.2@253.365,75.565
NetR2_1: R2.1 U5.8 | length 11.8
  Top Layer w0.3: U5.8 183.007,67.183 185.944,70.12 R2.1
OE: CON2.3 OE.1 U1.12 | length 102.7
  Top Layer w0.3: U1.12 251.161,119.635 v1(251.183,119.656) ; v2(260.223,91.567) 260.223,79.539 263.779,75.983 v1(263.779,62.357)
  Bottom Layer w0.3: CON2.3@240.538,48.133 CON2.3 241.919,46.903 257.977,46.903 263.556,52.482 263.556,62.053 263.779,62.276 v1(263.779,62.357) ; v1(251.183,119.656) 253.26,119.656 254.381,120.777 260.223,114.935 v2(260.223,91.567)
OTR: CON4.7 U6.28 | length 24.2
  Top Layer w0.3: CON4.7 213.741,62.23 v1(215.519,64.008) ; v1(221.996,66.929) 222.016,66.949 U6.28
  Bottom Layer w0.3: v1(215.519,64.008) 218.383,66.872 221.939,66.872 v1(221.996,66.929)
Pulser_Out: D1.3 Pulser_Out.1 R1.1 U3.1 | length 36.9
  Top Layer w1: D1.3 208.958,123.256 217.552,114.662 v1(226.949,114.662) ; v1(226.949,116.586) 226.949,117.348 228.854,119.253 229.025,119.082 233.018,119.082
  Bottom Layer w1: v1(226.949,114.662) v1(226.949,116.586)
Relay: CON3.7 Q1.1 R8.2 | length 79.5
  Top Layer w0.3: v1(194.945,46.228) 245.603,46.228 247.055,47.68 247.055,60.309 249.71,62.964 249.799,63.053 ; R8.2 248.285,64.389 249.621,63.053 249.799,63.053 ; Q1.1 249.799,63.053
  Bottom Layer w0.3: CON3.7 193.278,49.419 193.278,47.704 194.696,46.285 194.888,46.285 v1(194.945,46.228)
Stepper_1: CON3.10 CON5.1 | length 79.4
  Top Layer w0.3: CON5.1@186.817,124.714 186.817,124.587 189.484,121.92 v1@189.484,84.201
  Bottom Layer w0.3: v1@189.484,84.201 199.644,74.041 CON3.10
  other v1: 189.484,84.074
Stepper_2: CON3.9 CON5.2 | length 75
  Top Layer w0.3: CON5.2@186.944,120.777 188.874,118.847 188.874,91.211 188.214,90.551 v1(188.214,84.074)
  Bottom Layer w0.3: v1@188.214,84.201 188.214,84.171 197.104,75.281 CON3.9
Stepper_3: CON3.8 CON5.3 | length 70.3
  Top Layer w0.3: v1(186.817,84.074) 186.817,90.805 188.374,92.362 188.374,115.41 187.325,116.459 CON5.3@187.325,116.713
  Bottom Layer w0.3: v1(186.817,84.074) 194.564,76.327 CON3.8
VINA: C20.2 C21.2 R5.1 U6.46 | length 40
  Top Layer w0.3: C20.2 210.056,77.105 210.506,76.655 210.506,76.133 211.201,75.438 212.344,75.438 213.637,74.145 214.099,74.145 217.02,71.224 217.02,70.762 217.551,70.231 v1(218.694,70.231) ; U6.46 218.468,71.31 218.516,71.262 218.516,70.724 v1@218.516,70.33 ; v1(218.674,68.906) 219.508,68.906 v1(220.594,67.82) ; v1(227.386,66.873) 230.135,64.124 235.31,64.124 235.487,64.301 235.487,64.975 235.663,65.151 C21.2 ; C21.2@236.585,65.276 238.312,67.003 238.834,67.003 R5.1@239.268,67.437
  Bottom Layer w0.3: v1(218.674,68.906) 218.684,68.916 218.684,70.221 v1(218.694,70.231) ; v1(220.594,67.82) 220.651,67.763 221.162,67.763 221.346,67.579 222.265,67.579 223.057,66.787 226.71,66.787 226.739,66.816 227.328,66.816 v1(227.386,66.873)
VINB: C19.2 C21.1 R4.1 U6.47 | length 30
  Top Layer w0.3: C19.2 212.723,77.105 214.857,74.971 216.494,74.971 217.968,73.497 U6.47 ; v1(217.805,69.581) 220.263,69.581 v1(221.615,68.229) ; v1(217.866,70.993) 217.923,71.05 217.923,71.263 217.968,71.307 U6.47@217.968,72.263 ; v1(225.807,68.84) 229.346,68.84 230.352,67.834 R4.1 ; R4.1@232.408,67.834 234.135,66.107 234.135,65.585 C21.1@234.569,65.151
  Bottom Layer w0.3: v1(217.805,69.581) 217.862,69.638 217.862,70.239 217.866,70.243 v1(217.866,70.993) ; v1(221.615,68.229) 221.672,68.172 222.301,68.172 222.33,68.143 223.586,68.143 224.284,68.84 v1(225.807,68.84)
pads on no net: K1.NC U3.2 U4.12 U6.2 U6.5 U6.6 U6.8 U6.10 U6.11 U6.44 U11.6

## Polygon pours and split planes (outlines as drawn)
GND on PWR "GND_L03_P058" (solid, remove dead copper, pour order 58): 178.308,53.815 178.308,133.815 cw(c188.308,133.815) 188.308,143.815 268.308,143.815 cw(c268.308,133.815) 278.308,133.815 278.308,53.815 cw(c268.308,53.815) 268.308,43.815 188.308,43.815 cw(c188.308,53.815)
+5V on PWR "+5V_L03_P056" (solid, remove dead copper, pour order 56): 194.813,111.125 194.813,119.1 178.834,119.1 178.834,85.09 200.025,84.963 200.025,67.818 223.266,67.818 223.266,54.737 261.747,54.737 261.747,68.199 261.747,80.01 243.586,80.01 243.586,57.948 208.153,57.948 229.635,57.948 229.424,74.329 208.153,74.522 208.153,88.055 181.8,88.055 182.239,114.772 191.262,114.843 191.262,108.331 225.806,108.331 225.806,111.125
+12V on PWR "+12V_L03_P055" (solid, remove dead copper, pour order 55): 211.455,89.916 273.229,89.916 273.229,109.572 276.894,109.514 276.754,85.852 237.646,85.852 237.646,59.767 232.664,59.874 232.664,85.852 209.338,85.852 209.338,92.837 182.88,92.837 182.88,114.3 189.23,114.3 189.23,113.665 189.23,96.139 211.455,96.139
+10V on PWR "+10V_L03_P052" (solid, remove dead copper, pour order 52): 229.616,104.775 239.498,104.775 239.498,107.696 241.681,107.696 241.681,104.775 241.681,102.87 229.616,102.87
NetC3_1 on PWR "NETC3_1_L03_P053" (solid, remove dead copper, pour order 53): 235.585,111.633 235.585,111.76 246.253,111.76 246.253,115.316 246.253,115.443 253.471,115.443 253.471,118.128 251.75,118.128 251.75,119.383 253.471,119.383 254.508,119.372 254.508,114.3 258.191,114.3 258.191,113.03 254.18,113.03 254.18,114.173 253.111,114.173 246.888,114.173 246.888,110.363 237.744,110.363 237.617,110.363 237.49,110.363 237.49,106.045 235.585,106.045
+10V on PWR "+10V_L03_P054" (solid, remove dead copper, pour order 54): 213.487,100.838 216.408,100.838 216.408,91.821 213.487,91.821 213.487,98.552
+10V on PWR "+10V_L03_P051" (solid, remove dead copper, pour order 51): 233.553,91.821 233.386,104.665 229.596,104.665 229.596,94.996 216.027,94.996 216.027,91.821
+100V on PWR "+100V_L03_P050" (solid, remove dead copper, pour order 50): 217.043,121.92 221.234,121.92 221.234,127 224.79,127 224.79,119.888 224.282,119.888 217.043,119.888
+100V on PWR "+100V_L03_P049" (solid, remove dead copper, pour order 49): 260.985,134.112 260.985,122.555 221.234,122.555 221.234,122.809 221.234,123.317 221.234,127 224.79,127 224.79,124.333 259.207,124.333 259.207,134.112
NetC37_2 on PWR "NETC37_2_L03_P048" (solid, remove dead copper, pour order 48): 229.489,124.841 229.489,138.557 257.937,138.557 257.937,138.303 257.937,135.255 232.283,135.255 232.283,124.841
GND on Top Layer "GND_L01_P047" (solid, remove dead copper, pour order 47): 178.308,53.815 178.308,133.815 cw(c188.308,133.815) 188.308,143.815 268.308,143.815 cw(c268.308,133.815) 278.308,133.815 278.308,53.815 cw(c268.308,53.815) 268.308,43.815 188.308,43.815 cw(c188.308,53.815)
NetD1_2 on Top Layer "NETD1_2_L01_P043" (solid, remove dead copper, pour order 43): 211.836,130.556 214.63,130.556 214.63,132.08 216.662,132.08 216.662,129.413 211.836,129.413
NetC5_2 on Top Layer "NETC5_2_L01_P046" (solid, remove dead copper, pour order 46): 241.427,116.586 242.951,116.586 242.951,113.665 241.427,113.665
+100V on Top Layer "+100V_L01_P045" (solid, remove dead copper, pour order 45): 217.043,127.127 218.066,127.127 218.052,122.081 218.852,122.062 218.852,119.888 216.916,119.888 217.043,119.761
NetD1_1 on Top Layer "NETD1_1_L01_P044" (solid, remove dead copper, pour order 44): 217.17,132.08 219.202,132.08 219.202,127.254 219.075,127.381 210.312,127.381 210.312,128.778 210.439,128.651 217.17,128.651
Pulser_Out on Top Layer "PULSER_OUT_L01_P041" (solid, remove dead copper, pour order 41): 204.343,129.54 209.677,129.54 209.677,128.27 205.867,128.27 204.343,128.27
GND on Bottom Layer "GND_L04_P042" (solid, remove dead copper, pour order 42): 178.308,53.815 178.308,133.815 cw(c188.308,133.815) 188.308,143.815 268.308,143.815 cw(c268.308,133.815) 278.308,133.815 278.308,53.815 cw(c268.308,53.815) 268.308,43.815 188.308,43.815 cw(c188.308,53.815)
GND on GND "GND_L02_P057" (solid, remove dead copper, pour order 57): 178.308,53.815 178.308,133.815 cw(c188.308,133.815) 188.308,143.815 268.308,143.815 cw(c268.308,133.815) 278.308,133.815 278.308,53.815 cw(c268.308,53.815) 268.308,43.815 188.308,43.815 cw(c188.308,53.815)

## Silkscreen, mask and mechanical layers (free items; w line width, h text height)
Top Overlay:
  drawing of 38 lines, arcs and shapes, not listed
  text "Pulser_V2.0_FreeUni" at 240.919,139.7 h1.52
  text "Stepper CTRL" at 189.611,125.857 h1.52 r270
  text "+12V" at 189.357,114.3 h1.52 r270
  text "GND" at 189.103,110.49 h1.52 r270
  text "GND" at 189.103,106.807 h1.52 r270
  text "PWR IN" at 179.578,100.33 h1.52
  text "FPGA OUT" at 254.365,45.212 h1.52 r90

## Text inside footprints (layer, text, board x,y; h text height)
U4: Top Overlay "*" at 196.85,87.554 h1.27; Mechanical 13 "*" at 196.85,87.554 h1.27
U10: Top Overlay "XL7015" at 257.34,91.608 h2.03 r270; Top Overlay "DC-" at 260.47,106.569 h1; Top Overlay "OUT-" at 261.37,82.569 h1; Top Overlay "DC+" at 272.97,106.569 h1; Top Overlay "OUT +" at 273.07,82.569 h1
U11: Bottom Overlay "GND" at 239.513,59.309 h1.52 r180; Bottom Overlay "VCC_IN" at 233.417,59.563 h1.52 r180; Bottom Overlay "EN2" at 260.595,57.531 h1.52 r180; Bottom Overlay "HV_VCC" at 228.591,124.333 h1.52 r180; Bottom Overlay "EN1" at 263.77,57.531 h1.52 r180; Bottom Overlay "HV_GND" at 235.068,124.333 h1.52 r180